# EAGLE board PCB_board (EAGLE 9.6.2)
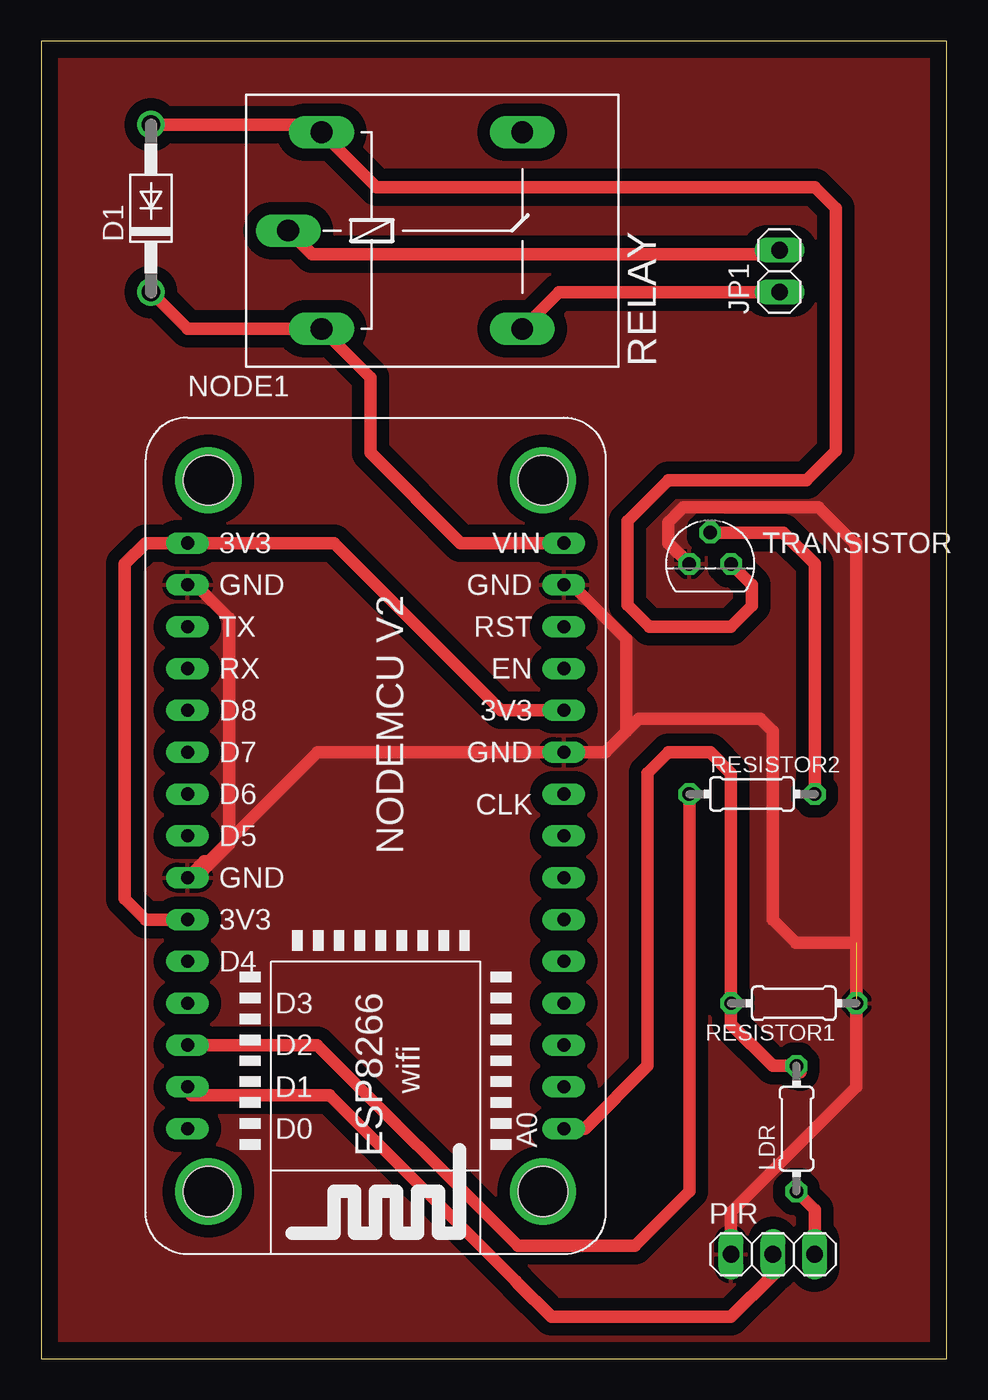
[diagram p0: board, top side]

Size 55 x 80 mm. Coordinates in mm from the lower left corner, seen from the top.
Outline: 0,0 55,0 55,80 0,80 0,0
Copper layers (1*16): Top 0.035mm / dielectric 1.5mm / Bottom 0.035mm
Design rules "default *": minimum track width 30mil, minimum drill 0.35mm, track to track 30mil, track to pad 20mil, pad to pad 6mil, via to via 30mil, smd to smd 6mil, copper to edge 40mil, drill to drill 8mil, minimum pad ring 10mil, minimum via ring 8mil, stop-mask expansion 4mil, vias tented up to drill 0mil, thermal gap 10mil

## Footprints (pad centres in the part's own frame; a part is rotated, then mirrored left to right if it is on the bottom)
DO41-10 = drill 1.118: A 5.08,0; C -5.08,0
1X02 = drill 1.016 long: 1 -1.27,0; 2 1.27,0
0204/7 = drill 0.813 octagon: 1 -3.81,0; 2 3.81,0
NODEMCU_ESP8266 = drill 0.8 long: 3V3@1 -11.43,19.05; 3V3@2 -11.43,-3.81; 3V3@3 11.43,8.89; A0 11.43,-16.51; CLK 11.43,3.81; CMD 11.43,-1.27; D0 -11.43,-16.51; D1 -11.43,-13.97; D2 -11.43,-11.43; D3 -11.43,-8.89; D4 -11.43,-6.35; D5 -11.43,1.27; D6 -11.43,3.81; D7 -11.43,6.35; D8 -11.43,8.89; EN 11.43,11.43; GND@1 -11.43,16.51; GND@2 -11.43,-1.27; GND@3 11.43,6.35; GND@4 11.43,16.51; RST 11.43,13.97; RSV1 11.43,-11.43; RSV2 11.43,-13.97; RX -11.43,11.43; SD1 11.43,-3.81; SD2 11.43,-6.35; SD3 11.43,-8.89; SDO 11.43,1.27; TX -11.43,13.97; VIN 11.43,19.05 | drill 3: P$31 10.16,22.86; P$32 -10.16,22.86; P$33 -10.16,-20.32; P$34 10.16,-20.32 | hole 3: 10.16,22.86; 10.16,-20.32; -10.16,-20.32; -10.16,22.86
1X03 = drill 1.016 long: 1 -2.54,0; 2 0,0; 3 2.54,0
G5LE = drill 1.321 long: 1 -7.493,-5.969; 2 -7.493,5.969; O 4.699,5.969; P -9.525,0; S 4.699,-5.969
TO92 = drill 0.813 octagon: 1 1.27,0; 2 0,1.905; 3 -1.27,0

## Placement (x,y rotation side)
D1  1N4004  [DO41-10]  6.67,69.85 90 top
JP1  [1X02]  44.85,66.04 90 top
LDR  [0204/7]  45.88,13.97 90 top
NODE1  NODEMCU_ESP8266  [NODEMCU_ESP8266]  20.32,30.48 0 top
PIR  [1X03]  44.45,6.35 0 top
RELAY  G5L  [G5LE]  24.53,68.5 0 top
RESISTOR1  [0204/7]  45.72,21.59 180 top
RESISTOR2  [0204/7]  43.18,34.29 0 top
TRANSISTOR  BC547B  [TO92]  40.64,48.26 0 top

## Library data of the parts
D1 = diode
JP1 PIR = pinhead
LDR RESISTOR1 RESISTOR2 = rcl; SPICEPREFIX: R
NODE1 = nodemcu_esp8266
RELAY = relay; OC_FARNELL: unknown; OC_NEWARK: unknown
TRANSISTOR = transistor-npn

## Nets
3V3: NODE1.3V3@1 NODE1.3V3@2 NODE1.3V3@3
A0: LDR.2 NODE1.A0 RESISTOR1.2
D1: NODE1.D1 PIR.2
D2: NODE1.D2 RESISTOR2.1
GND: NODE1.GND@1 NODE1.GND@2 NODE1.GND@3 NODE1.GND@4 PIR.1 RESISTOR1.1 TRANSISTOR.3
N$1: JP1.1 RELAY.S
N$2: D1.A RELAY.2 TRANSISTOR.1
N$3: RESISTOR2.2 TRANSISTOR.2
N$4: JP1.2 RELAY.P
VCC: LDR.1 PIR.3
VIN: D1.C NODE1.VIN RELAY.1

## Tracks (layer width: path | path; a pad name or v marks a point on that pad's centre or on a via)
3V3
  Top 0.762: NODE1.3V3@3 27.94,39.37 17.78,49.53 NODE1.3V3@1 6.35,49.53 5.08,48.26 5.08,27.94 6.35,26.67 NODE1.3V3@2
A0
  Top 0.762: 46.11,17.41 LDR.2 44.45,17.78 41.91,20.32 RESISTOR1.2 | 42.07,21.59 RESISTOR1.2 | NODE1.A0 33.02,13.97 36.83,17.78 36.83,35.56 38.1,36.83 40.64,36.83 41.91,35.56 RESISTOR1.2
D1
  Top 0.762: NODE1.D1 9.14,16 17.53,16 28.83,4.7 28.96,4.57 30.99,2.54 41.91,2.54 44.45,5.08 PIR.2
D2
  Top 0.762: NODE1.D2 16.76,19.05 28.96,6.86 36.07,6.86 39.37,10.16 RESISTOR2.1
GND  (1 unrouted)
  Top 0.762: 32,47.24 NODE1.GND@4 32.26,46.99 35.56,43.69 35.56,38.1 | 10.09,29.91 11.43,31.24 11.43,44.96 9.14,47.24 NODE1.GND@1 | 10.09,29.91 9.91,29.72 | 31.24,36.58 NODE1.GND@3 | 49.53,25.27 45.85,25.27 44.45,26.67 44.45,38.1 43.69,38.86 36.32,38.86 35.56,38.1 | 10.09,29.91 9.59,29.91 NODE1.GND@2 9.89,30.21 10.18,30.21 16.81,36.83 NODE1.GND@3 | TRANSISTOR.3 38.1,49.53 38.1,50.8 39.01,51.71 47.22,51.71 49.4,49.53 49.53,49.53 RESISTOR1.1 49.53,16.51 41.91,8.89 PIR.1 | 35.56,38.1 34.29,36.83 NODE1.GND@3
  pour Top: 0,80 55,80 55,0 0,0
N$1
  Top 0.762: JP1.1 31.47,64.77 RELAY.S
N$2
  Top 0.762: 6.92,74.68 D1.A 16.58,74.93 RELAY.2 20.39,71.12 46.99,71.12 48.26,69.85 48.26,55.12 46.48,53.34 38.1,53.34 35.62,50.86 35.62,45.78 36.95,44.45 41.91,44.45 43.18,45.72 43.18,46.99 TRANSISTOR.1
N$3
  Top 0.762: TRANSISTOR.2 45.09,50.16 46.99,48.26 RESISTOR2.2
N$4
  Top 0.762: JP1.2 44.34,67.06 16.45,67.06 RELAY.P
VCC
  Top 0.762: LDR.1 46.99,9.05 PIR.3
VIN
  Top 0.762: 32,49.53 NODE1.VIN 25.47,49.53 20,55 20,59.57 RELAY.1 8.91,62.53 D1.C 6.9,65